# Altium PCB HBridgeMainBoard.PcbDoc (part 2 of 3)
Units mm, origin at the board's own origin, x right, y up, seen from the top; angles counter-clockwise.
Board outline 100 x 50 mm, 2 copper layers (Top Layer, Bottom Layer); 90 components, 87 nets, 308 pads, 1694 vias.
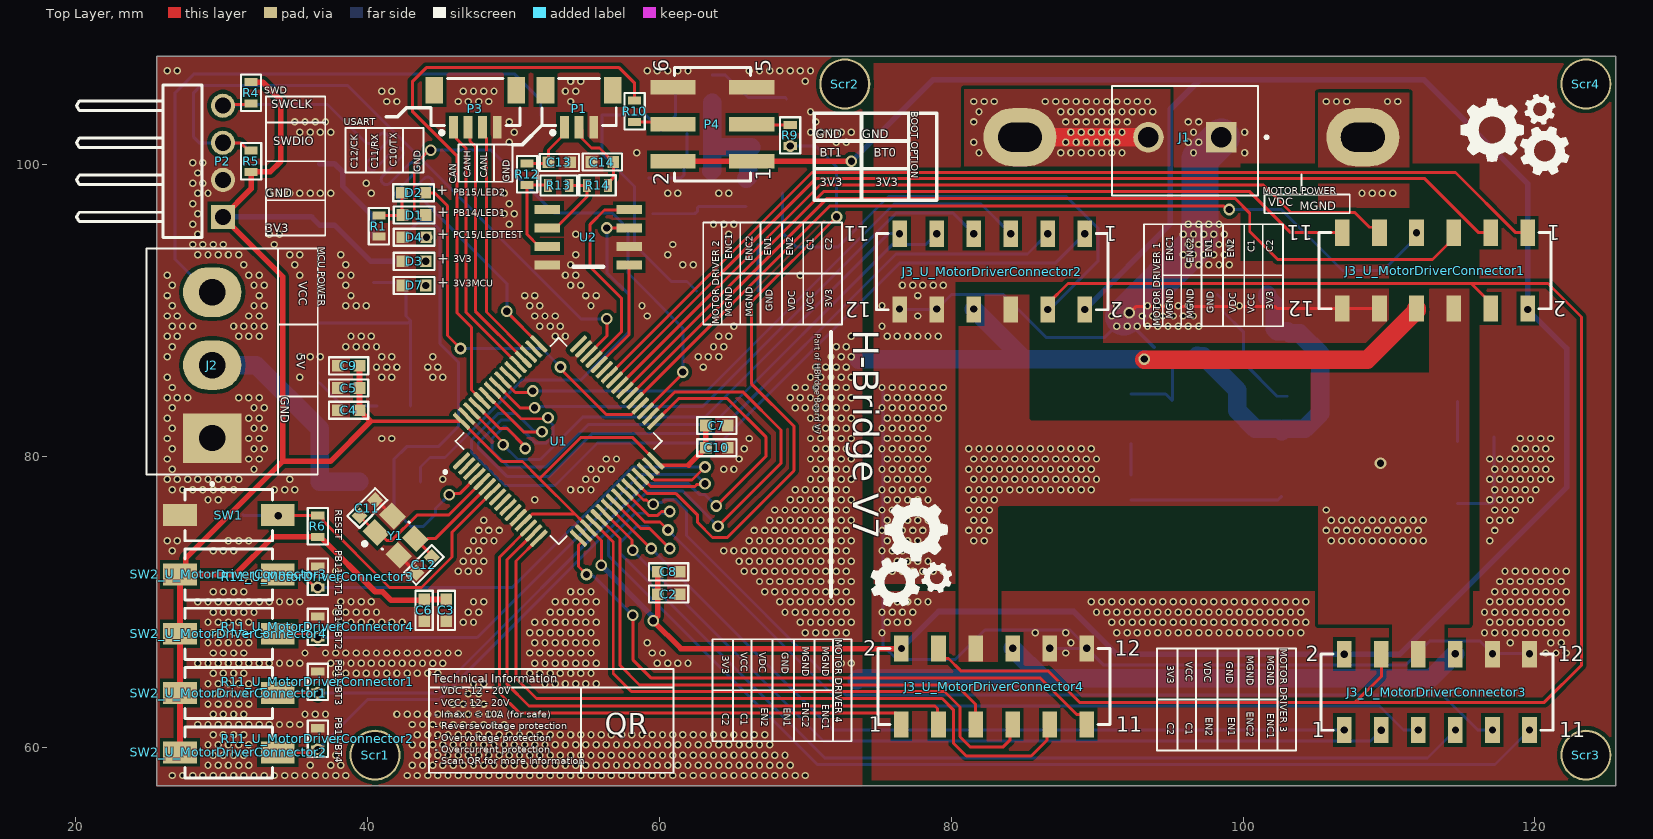
[diagram p0: Top Layer view]

## Part data (continued)
U3: library part CMP-098-000070-1, "AMS1117-3.3V, OUT 3.3V 1A.", Current Input Maximum=N/A, Current Output Maximum=1A, Manufacturer=AMS, Voltage Input Maximum=15V, Voltage Output=3.3V, Component Type=Standard, ComponentLink1Description="Datasheet link", ComponentLink1URL=http://www.advanced-monolithic.com/pdf/ds1117.pdf, ComponentLink2Description="Supplier 1 URL", ComponentLink2URL=N/A, ComponentLink3Description="Supplier 2 URL", ComponentLink3URL=N/A, ComponentLink4Description="Supplier 3 URL", ComponentLink4URL=N/A, Design Item ID=AMS1117-3.3V, Manufacturer Part Number=N/A, Mounting Technology=SMD, Pad Count=4, Pin Count=4, Source=AMS_family.SchLib, Supplier 1 Name=Mouser, Supplier 1 SN=N/A, Supplier 1 URL=N/A, Supplier 2 Name=Digi-Key, Supplier 2 SN=N/A, Supplier 2 URL=N/A, Supplier 3 Name=thegioiic, Supplier 3 SN=N/A, Supplier 3 URL=https://www.thegioiic.com/ams1117-3-3v-ic-on-ap-3-3v-1a-sot-223
Y1: library part CMP-003-00057-1, "CRYSTAL 8.000MHZ 8PF SMD", Case/Package=NX3225SA, Frequency=25MHz, Load Capacitance=8pF, Manufacturer=NDK, Manufacturer Part Number=NX3225SA-25.000M-STD-CRS-2, Temperature="-40°C to +125°C", Temperature Range High=125°C, Temperature Range Low=-40°C, Tolerance=15ppm, Automotive=Yes, Automotive Grade="Grade 1", Category=Crys, Component Type=Standard, Design Item ID=CMP-200220-000002-1, Device Class L1="Passive Components", Device Class L2="Crystals / Oscillators", Device Class L3=Crystals, Digikey Description="CRYSTAL 25.0000MHZ 8PF SMD", Esr=100, Height=0.6mm, Lead Free=Yes, Octopart=https://octopart.com/nx3225sa-25.000m-std-crs-2-ndk-51374293, Pins=4, RoHS=TRUE, Series=NX3225SA, Source="Components - 28.03.25 - 23.15.SchLib"

## Via types
v1: diameter 0.508, hole 0.3, Top Layer to Bottom Layer, tented both sides, 1624 vias
v2: diameter 0.8, hole 0.5, Top Layer to Bottom Layer, tented both sides, 64 vias
v3: diameter 0.8, hole 0.5, Top Layer to Bottom Layer, 6 vias

## Nets (pads, with @x,y where several pads share a name; then routed paths per layer and width w, separated by ;. In a path a pad name is that pad's centre, name@x,y a point inside that pad or via, vN(x,y) a via of type N, cw(c..) or ccw(c..) an arc to the next point about the centre after c; other vN are vias at no path point)
3V3: C2.2 C3.2 C4.2 C5.2 C6.2 C7.2 C8.2 C9.2 C10.2 F4.1 J3_U_MotorDriverConnector1.2 J3_U_MotorDriverConnector2.2 J3_U_MotorDriverConnector3.2 J3_U_MotorDriverConnector4.2 P2.1 P4.1 P4.2 R2.2 R4.2 R5.2 R6.2 SW2_U_MotorDriverConnector1.2 SW2_U_MotorDriverConnector2.2 SW2_U_MotorDriverConnector3.2 SW2_U_MotorDriverConnector4.2 U1.13 U1.19 U1.32 U1.64 | length 324.1
  Top Layer w0.203: U1.64@46.425,82.384 46.431,82.384 49.186,79.629 50.6,79.629 51.78,78.45 ; U1.13@50.668,75.426 50.674,75.426 51.273,76.025 54.205,76.025 ; U1.19@55.151,75.066 56.007,74.21 v2(56.007,72.517) ; U1.19@55.151,75.072 54.699,75.53 54.205,76.025 ; U1.32@59.747,79.668 59.741,79.668 58.129,81.28 54.61,81.28 51.78,78.45 ; 51.78,78.45 54.205,76.025
  Top Layer w0.254: 40.185,82.384 U1.64@46.425,82.384 ; U1.32@60.04,79.375 61.988,79.375
  Top Layer w0.381: SW2_U_MotorDriverConnector2.2@27.13,59.69 SW2_U_MotorDriverConnector1.2@27.13,63.754 SW2_U_MotorDriverConnector4.2@27.13,67.818 SW2_U_MotorDriverConnector3.2@27.13,71.882 ; R4.2@32.004,105.627 32.803,105.627 34.036,104.394 34.036,100.203 33.311,99.478 R5.2@32.004,99.478 32.004,98.322 P2.1@30.075,96.393 34.166,92.302 34.166,79.632 ; C9.2@39.434,86.182 C5.2@39.434,84.658 C4.2@39.434,83.134 40.185,82.384 37.433,79.632 34.166,79.632 ; C3.2@45.39,70.168 C6.2@43.866,70.168 43.802,70.104 41.609,70.104 41.014,70.699 40.511,70.699 36.751,74.459 33.492,74.459 30.915,71.882 SW2_U_MotorDriverConnector3.2@27.13,71.882 ; C8.2@59.88,72.06 C2.2@59.88,70.536 59.88,69.024 v2(59.563,68.707) 61.468,66.802 v2(76.581,66.802) ; P4.2@60.927,100.203 P4.1@66.327,100.203 v2(73.152,100.203) ; 61.988,79.375 C10.2@63.182,80.569 C7.2@63.182,82.093 ; SW2_U_MotorDriverConnector3.2@27.13,71.882 27.514,72.266 27.514,72.98 34.166,79.632
  Bottom Layer w0.381: P2.1@30.075,96.393 36.144,96.393 F4.1@36.703,95.834 37.719,95.834 40.208,93.345 R2.2@42.582,93.345 ; v2(56.007,72.517) 59.483,69.041 59.483,68.787 v2(59.563,68.707) ; v2(73.152,100.203) 78.74,105.791 97.028,105.791 ; v2(76.581,66.802) 79.121,69.342 88.392,69.342 91.313,66.421 v2(106.934,66.421) 110.744,66.421 122.174,77.851 122.174,87.376 v2(119.507,90.043) 119.507,98.679 112.395,105.791 97.028,105.791 ; v2(89.154,90.043) 95.007,95.896 95.007,103.77 97.028,105.791
5V: C15.1 D5.A F3.0 J2.2 | length 15.5
  Bottom Layer w1.27: J2.2@29.337,86.233 32.339,86.233 D5.A@36.703,81.869 C15.1@36.703,78.254 36.714,78.243 39.399,78.243 F3.0@39.41,78.232
BOOT0: R9.1 U1.28 | length 42.9
  Top Layer w0.203: U1.28@58.333,78.254 58.339,78.254 59.145,77.448 61.109,77.448 62.611,75.946 62.611,75.438 63.627,74.422 64.643,74.422 69.215,78.994 69.215,82.042 66.294,84.963 66.294,90.551 v2(72.136,96.393)
  Bottom Layer w0.203: v2(68.961,101.256) 70.702,101.256 72.136,99.822 v2(72.136,96.393)
BOOT1: R10.1 U1.60 | length 41.1
  Top Layer w0.203: U1.60@47.839,83.798 47.839,83.804 47.117,84.526 47.117,88.823 46.101,89.839 46.101,100.584 43.053,103.632 43.053,105.664 44.012,106.623 57.23,106.623 58.293,105.56 R10.1@58.293,104.357
CAN5V: F3.1 U2.3 | length 28.4
  Top Layer w0.203: v2(56.388,95.631) U2.3@57.918,95.631
  Bottom Layer w0.203: F3.1@43.612,78.232 43.612,79.248 44.272,79.908 45.288,79.908 50.59,85.211 54.604,85.211 57.918,88.525 57.918,91.053 56.388,92.583 v2(56.388,95.631)
CAN_RX: U1.45 U2.4 | length 14
  Top Layer w0.203: U1.45@55.504,86.626 55.504,86.633 57.404,88.532 57.404,90.805 55.245,92.964 55.245,95.885 56.222,96.862 57.879,96.862 U2.4@57.918,96.901
CAN_TX: U1.44 U2.1 | length 7.7
  Top Layer w0.203: U1.44@55.858,86.273 57.918,88.333 U2.1@57.918,93.091
EN1_U_MotorDriverConnector1: J3_U_MotorDriverConnector1.7 U1.37 | length 62.2
  Top Layer w0.203: U1.37@58.333,83.798 71.69,97.155 98.645,97.155 98.899,96.901 v2(99.06,96.901)
  Bottom Layer w0.203: v2(99.06,96.901) 102.616,96.901 106.807,92.71 109.601,92.71 111.773,94.882 111.773,95.196 v2(111.887,95.31)
EN1_U_MotorDriverConnector2: J3_U_MotorDriverConnector2.7 U1.57 | length 39.4
  Top Layer w0.203: U1.57@48.9,84.859 50.478,83.28 51.403,83.28 v2(51.435,83.312)
  Bottom Layer w0.203: v2(51.435,83.312) 51.508,83.385 62.938,83.385 76.2,96.647 80.13,96.647 v2(81.534,95.243)
EN1_U_MotorDriverConnector3: J3_U_MotorDriverConnector3.7 U1.24 | length 74.2
  Top Layer w0.203: U1.24@56.919,76.84 58.736,75.022 59.344,75.022 v2(60.706,73.66)
  Bottom Layer w0.203: v2(60.706,73.66) 59.182,75.184 58.42,75.184 57.277,74.041 57.277,73.353 71.321,59.309 112.642,59.309 v3(114.554,61.221)
EN1_U_MotorDriverConnector4: J3_U_MotorDriverConnector4.7 U1.20 | length 42.7
  Top Layer w0.203: U1.20@55.504,75.426 56.826,74.104 56.826,65.094 58.064,63.856 79.539,63.856 80.594,62.8 80.594,60.766 81.289,60.071 83.566,60.071 84.011,60.516 84.011,61.412 J3_U_MotorDriverConnector4.7@84.201,61.602
EN2_U_MotorDriverConnector1: J3_U_MotorDriverConnector1.5 U1.38 | length 65.5
  Top Layer w0.203: U1.38@57.979,84.151 57.985,84.151 71.497,97.663 99.441,97.663 100.457,96.647 100.457,95.389 102.374,93.472 112.989,93.472 114.427,94.91 J3_U_MotorDriverConnector1.5@114.427,95.31
EN2_U_MotorDriverConnector2: J3_U_MotorDriverConnector2.5 U1.56 | length 41.4
  Top Layer w0.203: U1.56@49.253,85.212 50.113,84.353 51.206,84.353 v2(51.308,84.455)
  Bottom Layer w0.203: v2(51.308,84.455) 63.246,84.455 76.073,97.282 82.035,97.282 v2(84.074,95.243)
EN2_U_MotorDriverConnector3: J3_U_MotorDriverConnector3.5 U1.25 | length 61.4
  Top Layer w0.203: U1.25@57.272,77.193 58.986,75.48 60.029,75.48 v2(60.579,74.93)
  Bottom Layer w0.203: v2(60.579,74.93) 72.644,62.865 109.354,62.865 110.998,61.221 v3(112.014,61.221)
EN2_U_MotorDriverConnector4: J3_U_MotorDriverConnector4.5 U1.21 | length 37.6
  Top Layer w0.203: U1.21@55.858,75.779 55.858,75.773 57.283,74.347 57.283,65.653 58.623,64.313 80.34,64.313 81.661,62.992 J3_U_MotorDriverConnector4.5@81.661,61.602
ENC_C1_U_MotorDriverConnector1: J3_U_MotorDriverConnector1.3 U1.41 | length 67.3
  Top Layer w0.203: U1.41@56.919,85.212 70.741,99.035 112.426,99.035 116.15,95.31 J3_U_MotorDriverConnector1.3@116.967,95.31
ENC_C1_U_MotorDriverConnector2: J3_U_MotorDriverConnector2.3 U1.58 | length 59.8
  Top Layer w0.203: U1.58@48.546,84.505 50.495,82.556 52.285,82.556 v2(52.358,82.63)
  Bottom Layer w0.203: v2(52.358,82.63) 52.358,82.468 52.699,82.128 52.699,81.348 52.256,80.905 51.481,80.905 49.913,82.474 49.147,82.474 47.574,80.901 47.574,80.569 49.53,78.613 52.451,78.613 55.372,81.534 63.881,81.534 76.2,93.853 85.224,93.853 v2(86.614,95.243)
ENC_C1_U_MotorDriverConnector3: J3_U_MotorDriverConnector3.3 U1.22 | length 60.4
  Top Layer w0.203: U1.22@56.211,76.133 58.106,74.238 58.106,73.593 v2(58.166,73.533)
  Bottom Layer w0.203: v2(58.166,73.533) 71.234,60.465 108.725,60.465 v3(109.474,61.214)
ENC_C1_U_MotorDriverConnector4: J3_U_MotorDriverConnector4.3 U1.15 | length 42.4
  Top Layer w0.203: U1.15@51.375,74.719 51.375,74.712 49.53,72.868 49.53,64.389 51.054,62.865 78.867,62.865 79.044,62.688 79.044,61.679 J3_U_MotorDriverConnector4.3@79.121,61.602
ENC_C2_U_MotorDriverConnector1: J3_U_MotorDriverConnector1.1 U1.42 | length 70.4
  Top Layer w0.203: U1.42@56.565,85.566 56.571,85.566 70.447,99.441 114.559,99.441 118.69,95.31 J3_U_MotorDriverConnector1.1@119.507,95.31
ENC_C2_U_MotorDriverConnector2: J3_U_MotorDriverConnector2.1 U1.59 | length 61.9
  Top Layer w0.203: U1.59@48.193,84.151 48.193,84.145 50.677,81.661 v2(51.943,81.661)
  Bottom Layer w0.203: v2(51.943,81.661) 51.902,81.702 51.394,81.702 50.165,82.931 48.957,82.931 47.117,81.091 47.117,80.264 49.403,77.978 52.832,77.978 55.753,80.899 64.135,80.899 76.454,93.218 87.129,93.218 v2(89.154,95.243)
ENC_C2_U_MotorDriverConnector3: J3_U_MotorDriverConnector3.1 U1.23 | length 56.7
  Top Layer w0.203: U1.23@56.565,76.486 56.571,76.486 59.398,73.66 v2(59.436,73.66)
  Bottom Layer w0.203: v2(59.436,73.66) 71.875,61.221 v3(106.934,61.221)
ENC_C2_U_MotorDriverConnector4: J3_U_MotorDriverConnector4.1 U1.14 | length 40.8
  Top Layer w0.203: U1.14@51.021,75.072 51.021,75.066 49.022,73.067 49.022,63.754 50.376,62.4 76.183,62.4 76.581,62.002 J3_U_MotorDriverConnector4.1@76.581,61.602